# EAGLE board avoccado-panel-felina-faye-gin (EAGLE 7.2.0), part 1 of 11
Avoccado PCB AVR
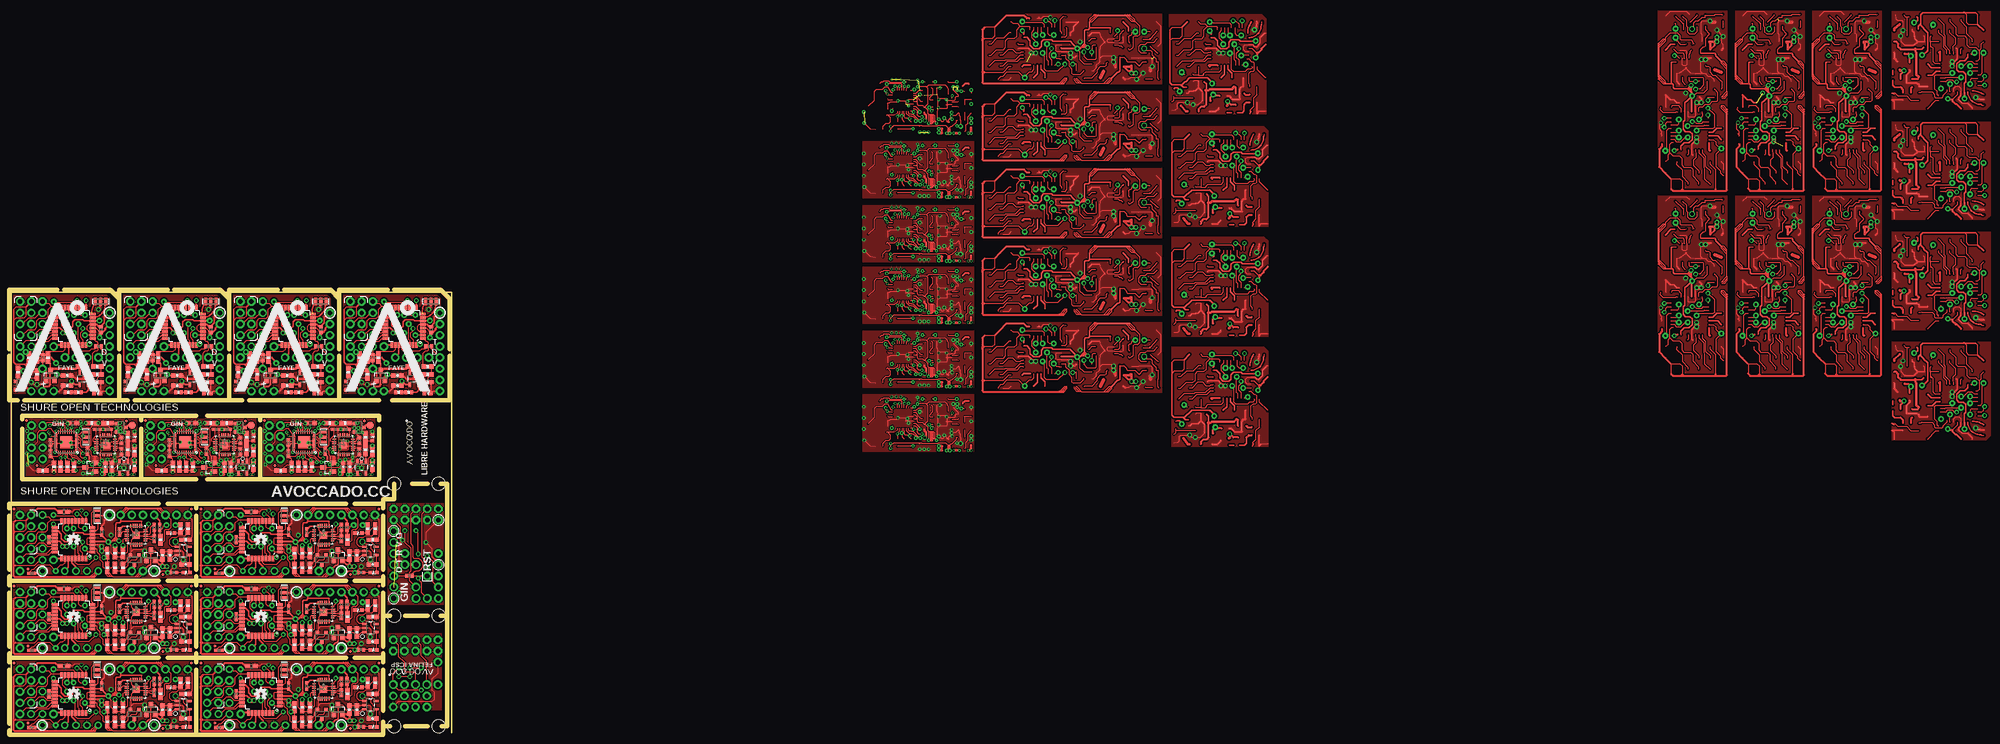
[diagram p0: board, top side]
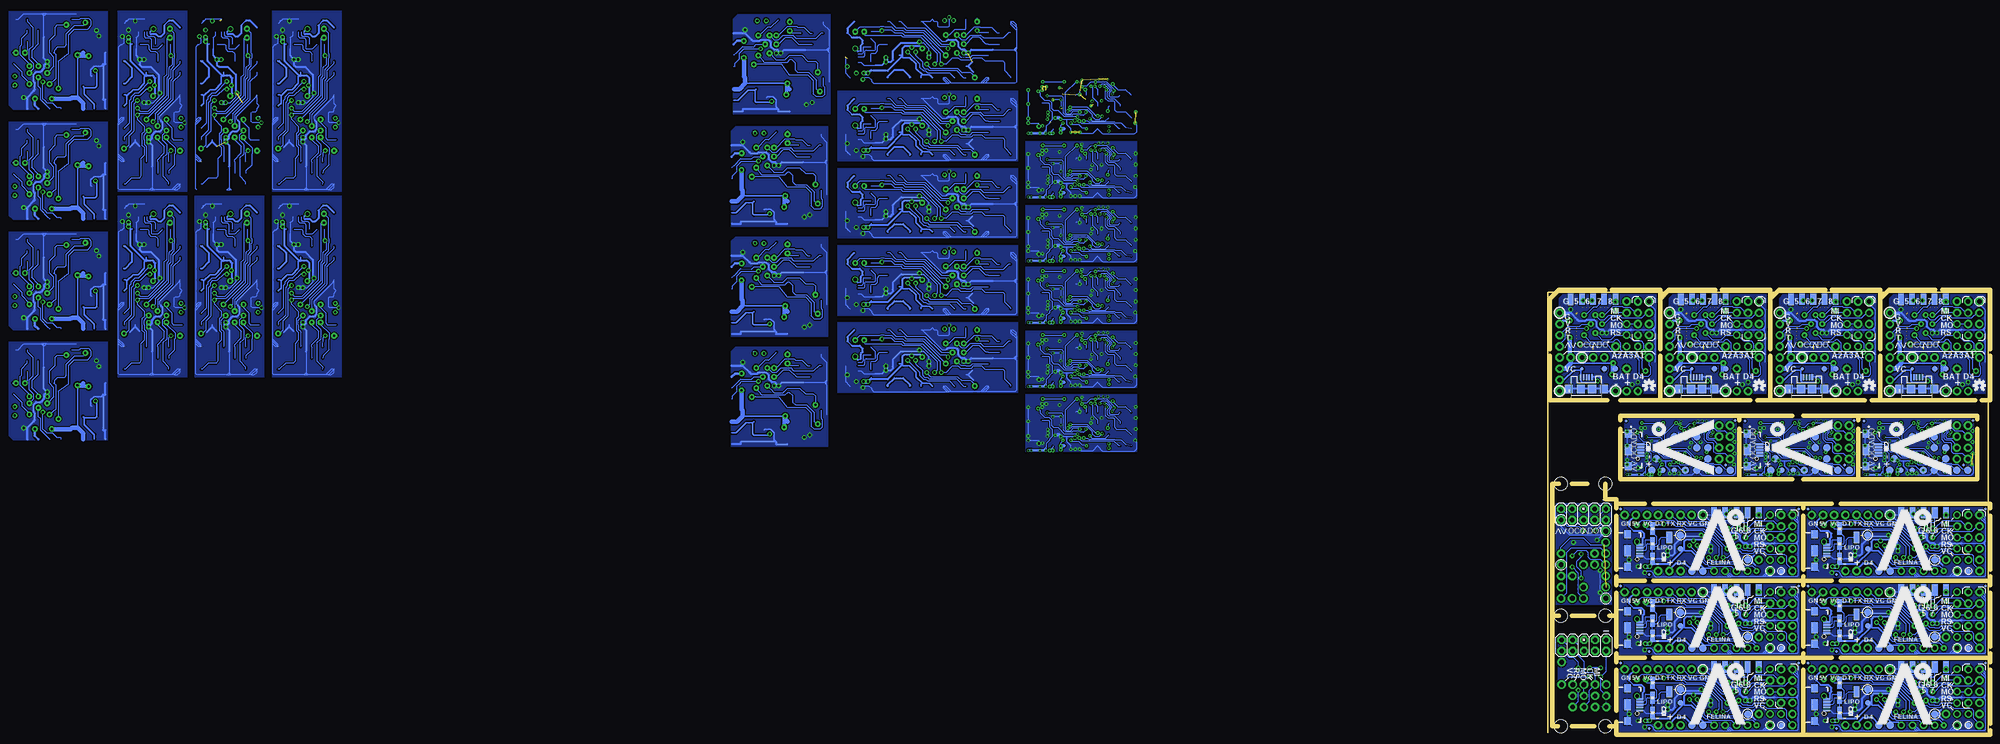
[diagram p1: board, bottom side, seen from below]

Size 100 x 100 mm. Coordinates in mm from the lower left corner, seen from the top.
Outline: 0,0 0,100 100,100 100,0
Copper layers (1*16): Top 0.035mm / dielectric 1.5mm / Bottom 0.035mm
Design rules "SeeedStudio_2layer_DRU_no_angle_20140221 *": minimum track width 6mil, minimum drill 12mil, track to track 6mil, track to pad 6mil, pad to pad 6mil, via to via 6mil, smd to smd 0mil, copper to edge 10mil, drill to drill 10mil, minimum pad ring 10mil, minimum via ring 6mil, stop-mask expansion 0mil, vias tented up to drill 100mil, thermal gap 10mil
Net classes: 1 vcc: width 0.152 mm; 3 usbvcc: width 0.203 mm, drill 0.61 mm, clearance 0.152 mm
Holes 3 mm at 97,1.5 87,1.5 97,26.5 87,26.5 87,26.5 97,26.5 87,56.5 97,56.5
tRestrict: area 10.1,4.7 to 18.2,12.9; area 26.4,7.8 to 30.4,11.9; area 24.3,9.3 to 26.4,11.9; area 52.6,4.7 to 60.7,12.9; area 68.9,7.8 to 72.9,11.9; area 66.8,9.3 to 68.9,11.9; area 10.1,22.2 to 18.2,30.4; area 26.4,25.3 to 30.4,29.4; area 24.3,26.8 to 26.4,29.4; area 52.6,22.2 to 60.7,30.4; area 68.9,25.3 to 72.9,29.4; area 66.8,26.8 to 68.9,29.4; 16 more areas
Milling: 96 lines

## Footprints (pad centres in the part's own frame; a part is rotated, then mirrored left to right if it is on the bottom)
C0402K = smd 0.925 x 0.74: 1 -0.6,0; 2 0.6,0
0603-CAP = smd 1.1 x 1: 1 -0.85,0; 2 0.85,0
C0603 = smd 1.1 x 1: 1 -0.85,0; 2 0.85,0
C0402 = smd 0.7 x 0.9: 1 -0.65,0; 2 0.65,0
LED-0603 = smd 0.8 x 0.8: A 0,-0.75; C 0,0.75
MICRO-FIDUCIAL = smd 0.635 x 0.635: 1 0,0
1X01NS-KIT = drill 1 pad 1.676: 1 0,0
1X02_NO_SILK = drill 1.016 pad 1.88: 1 0,0; 2 2.54,0
1X01 = drill 1.016 pad 1.88: 1 0,0
USB-B-MICRO-SMD_V03 = smd 1.6 x 0.4: D+1 2.8,0; D-1 2.8,0.65; GND1 2.8,-1.3; ID1 2.8,-0.65; VBUS1 2.8,1.3 | smd 1.5 x 1.8: SHIELD1 0,3.7; SHIELD2 0,-3.7 | smd 1.5 x 2.5: SHIELD3 0,0 | hole 0.8: 2.15,-2
USB-MICROB = smd 0.35 x 1.4: D+ 0,2.65; D- -0.65,2.65; GND 1.3,2.65; ID 0.65,2.65; VBUS -1.3,2.65 | smd 1.8 x 1.9: MT1 -4,0; MT2 4,0 | smd 1.9 x 1.9: P$1 -1.27,0; P$2 1.27,0
SOT23 = smd 1 x 1.4: 1 -0.95,-1.1; 2 0.95,-1.1; 3 0,1.1
TQFP32-08 = smd 1.27 x 0.559: 1 -4.293,2.8; 2 -4.293,2; 3 -4.293,1.2; 4 -4.293,0.4; 5 -4.293,-0.4; 6 -4.293,-1.2; 7 -4.293,-2; 8 -4.293,-2.8; 17 4.293,-2.8; 18 4.293,-2; 19 4.293,-1.2; 20 4.293,-0.4; 21 4.293,0.4; 22 4.293,1.2; 23 4.293,2; 24 4.293,2.8 | smd 0.559 x 1.27: 9 -2.8,-4.293; 10 -2,-4.293; 11 -1.2,-4.293; 12 -0.4,-4.293; 13 0.4,-4.293; 14 1.2,-4.293; 15 2,-4.293; 16 2.8,-4.293; 25 2.8,4.293; 26 2,4.293; 27 1.2,4.293; 28 0.4,4.293; 29 -0.4,4.293; 30 -1.2,4.293; 31 -2,4.293; 32 -2.8,4.293
RESONATOR-SMD = smd 0.7 x 1.7: 1 -1.2,0; 2 0,0; 3 1.2,0
SOT23-3 = smd 0.8 x 0.9: 1 -0.95,-1; 2 0.95,-1; 3 0,1.1
0603-RES = smd 1.1 x 1: 1 -0.85,0; 2 0.85,0
R0402 = smd 0.7 x 0.9: 1 -0.65,0; 2 0.65,0
0402-RES = smd 0.7 x 0.9: 1 -0.65,0; 2 0.65,0
PAD.02X.02 = smd 2.54 x 1.27: P$1 0,0
PAD.03X.05 = smd 1.27 x 1.27: P$1 0,0
TP20R = smd 1.7 x 1.7: TP 0,0
PAD.03X.03 = smd 0.762 x 0.762: P$1 0,0
P1-13 = drill 1.1 pad 1.93: TP 0,0
QFN-24-TESTING = smd 1.016 x 0.254: 1 -2.1,1.257; 6 -2.1,-1.25; 13 2.1,-1.25; 18 2.1,1.25 | smd 1.143 x 0.254: 2 -2.163,0.75; 3 -2.163,0.25; 4 -2.163,-0.25; 5 -2.163,-0.75; 14 2.163,-0.75; 15 2.163,-0.25; 16 2.163,0.25; 17 2.163,0.75 | smd 0.254 x 1.016: 7 -1.25,-2.1; 12 1.25,-2.1; 19 1.25,2.1; 24 -1.25,2.1 | smd 0.254 x 1.143: 8 -0.75,-2.163; 9 -0.25,-2.163; 10 0.25,-2.163; 11 0.75,-2.163; 20 0.75,2.163; 21 0.25,2.163; 22 -0.25,2.163; 23 -0.75,2.163 | smd 1.626 x 1.626: P$1 0,0
SOT23-5 = smd 0.55 x 1.2: 1 -0.95,-1.3; 2 0,-1.3; 3 0.95,-1.3; 4 0.95,1.3; 5 -0.95,1.3
MLF32-PAD = smd 0.7 x 0.25: 1 -2.35,1.75; 8 -2.35,-1.75; 17 2.35,-1.75; 24 2.35,1.75 | smd 0.8 x 0.25: 2 -2.35,1.25; 3 -2.35,0.75; 4 -2.35,0.25; 5 -2.35,-0.25; 6 -2.35,-0.75; 7 -2.35,-1.25; 18 2.35,-1.25; 19 2.35,-0.75; 20 2.35,-0.25; 21 2.35,0.25; 22 2.35,0.75; 23 2.35,1.25 | smd 0.25 x 0.7: 9 -1.75,-2.35; 16 1.75,-2.35; 25 1.75,2.35; 32 -1.75,2.35 | smd 0.25 x 0.8: 10 -1.25,-2.35; 11 -0.75,-2.35; 12 -0.25,-2.35; 13 0.25,-2.35; 14 0.75,-2.35; 15 1.25,-2.35; 26 1.25,2.35; 27 0.75,2.35; 28 0.25,2.35; 29 -0.25,2.35; 30 -0.75,2.35; 31 -1.25,2.35 | smd 2.75 x 2.75: PAD 0,0
AVR_ICSP = drill 1.016 pad 1.88 octagon: 1 -1.27,5.08; 2 1.27,5.08; 3 -1.27,2.54; 4 1.27,2.54; 5 -1.27,0; 6 1.27,0; 7 -1.27,-2.54; 8 1.27,-2.54; 9 -1.27,-5.08; 10 1.27,-5.08

## Placement (x,y rotation side)
C1  0.1uF  [C0402K]  8.59,8.8 90 top
C2  0.1uF  [C0402K]  33.73,11.6 90 top
C3  0.1uF  [C0402K]  20.53,10.57 270 top
C4  4.7uF  [0603-CAP]  39.58,3.22 180 top
C5  4.7uF  [0603-CAP]  36.02,5.25 90 top
C6  4.7uF  [0603-CAP]  34.32,5.25 90 top
C7  0.1uF  [C0402K]  4.65,1.18 0 top
C8  0.1uF  [C0402K]  32.47,11.6 270 top
C9  2.2nF  [C0402K]  24.59,10.58 90 top
C10  0.1uF  [C0603]  12.02,15.15 0 top
C11  0.1uF  [C0402K]  32.47,9.06 90 top
C12  0.1uF  [C0603]  54.52,15.15 0 top
C13  0.1uF  [C0402K]  63.03,10.57 270 top
C14  0.1uF  [C0402K]  51.09,8.8 90 top
C15  4.7uF  [0603-CAP]  82.08,3.22 180 top
C16  0.1uF  [C0402K]  76.23,11.6 90 top
C17  4.7uF  [0603-CAP]  78.52,5.25 90 top
C18  4.7uF  [0603-CAP]  76.82,5.25 90 top
C19  0.1uF  [C0402K]  47.15,1.18 0 top
C20  0.1uF  [C0402K]  74.97,11.6 270 top
C21  2.2nF  [C0402K]  67.09,10.58 90 top
C22  0.1uF  [C0402K]  74.97,9.06 90 top
C23  0.1uF  [C0603]  12.02,32.65 0 top
C24  0.1uF  [C0402K]  20.53,28.07 270 top
C25  0.1uF  [C0402K]  8.59,26.3 90 top
C26  4.7uF  [0603-CAP]  39.58,20.72 180 top
C27  0.1uF  [C0402K]  33.73,29.1 90 top
C28  4.7uF  [0603-CAP]  36.02,22.75 90 top
C29  4.7uF  [0603-CAP]  34.32,22.75 90 top
C30  0.1uF  [C0402K]  4.65,18.68 0 top
C31  0.1uF  [C0402K]  32.47,29.1 270 top
C32  2.2nF  [C0402K]  24.59,28.08 90 top
C33  0.1uF  [C0402K]  32.47,26.56 90 top
C34  0.1uF  [C0603]  54.52,32.65 0 top
C35  0.1uF  [C0402K]  63.03,28.07 270 top
C36  0.1uF  [C0402K]  51.09,26.3 90 top
C37  4.7uF  [0603-CAP]  82.08,20.72 180 top
C38  0.1uF  [C0402K]  76.23,29.1 90 top
C39  4.7uF  [0603-CAP]  78.52,22.75 90 top
C40  4.7uF  [0603-CAP]  76.82,22.75 90 top
C41  0.1uF  [C0402K]  47.15,18.68 0 top
C42  0.1uF  [C0402K]  74.97,29.1 270 top
C43  2.2nF  [C0402K]  67.09,28.08 90 top
C44  0.1uF  [C0402K]  74.97,26.56 90 top
C45  0.1uF  [C0603]  12.02,50.15 0 top
C46  0.1uF  [C0402K]  20.53,45.57 270 top
C47  0.1uF  [C0402K]  8.59,43.8 90 top
C48  4.7uF  [0603-CAP]  39.58,38.22 180 top
C49  0.1uF  [C0402K]  33.73,46.6 90 top
C50  4.7uF  [0603-CAP]  36.02,40.25 90 top
C51  4.7uF  [0603-CAP]  34.32,40.25 90 top
C52  0.1uF  [C0402K]  4.65,36.18 0 top
C53  0.1uF  [C0402K]  32.47,46.6 270 top
C54  2.2nF  [C0402K]  24.59,45.58 90 top
C55  0.1uF  [C0402K]  32.47,44.06 90 top
C56  0.1uF  [C0603]  54.52,50.15 0 top
C57  0.1uF  [C0402K]  63.03,45.57 270 top
C58  0.1uF  [C0402K]  51.09,43.8 90 top
C59  4.7uF  [0603-CAP]  82.08,38.22 180 top
C60  0.1uF  [C0402K]  76.23,46.6 90 top
C61  4.7uF  [0603-CAP]  78.52,40.25 90 top
C62  4.7uF  [0603-CAP]  76.82,40.25 90 top
C63  0.1uF  [C0402K]  47.15,36.18 0 top
C64  0.1uF  [C0402K]  74.97,46.6 270 top
C65  2.2nF  [C0402K]  67.09,45.58 90 top
C66  0.1uF  [C0402K]  74.97,44.06 90 top
C67  4.7uF  [C0603]  14.01,70.27 0 top
C68  0.1uF  [C0402K]  17.31,63.93 90 top
C69  0.1uF  [C0402K]  8.93,65.82 90 top
C70  4.7uF  [0603-CAP]  27.98,60.62 90 top
C71  4.7uF  [0603-CAP]  22.9,60.36 90 top
C72  4.7uF  [0603-CAP]  21.37,60.36 90 top
C73  0.1uF  [C0402K]  8.93,63.41 90 top
C74  0.1uF  [C0402K]  25.05,66.33 90 top
C75  2.2nF  [C0402K]  19.59,68.87 0 top
C76  0.1uF  [C0402K]  25.06,63.82 270 top
C77  0.1uF  [C0402K]  22.01,68.87 0 top
C78  4.7uF  [C0603]  41.01,70.27 0 top
C79  0.1uF  [C0402K]  44.31,63.93 90 top
C80  0.1uF  [C0402K]  35.93,65.82 90 top
C81  4.7uF  [0603-CAP]  54.98,60.62 90 top
C82  4.7uF  [0603-CAP]  49.9,60.36 90 top
C83  4.7uF  [0603-CAP]  48.37,60.36 90 top
C84  0.1uF  [C0402K]  35.93,63.41 90 top
C85  0.1uF  [C0402K]  52.05,66.33 90 top
C86  2.2nF  [C0402K]  46.59,68.87 0 top
C87  0.1uF  [C0402K]  52.06,63.82 270 top
C88  0.1uF  [C0402K]  49.01,68.87 0 top
C89  0.1uF  [C0402]  79.32,82.35 270 top
C90  0.1uF  [C0402]  95.32,91.49 270 top
C91  0.1uF  [C0402]  83.64,92.26 90 top
C92  4.7uF  [0603-CAP]  87.7,78.79 180 top
C93  0.1uF  [C0402]  94.81,87.69 0 top
C94  4.7uF  [0603-CAP]  91,83.11 0 top
C95  4.7uF  [0603-CAP]  87.7,81.08 0 top
C96  0.1uF  [C0402]  82.11,85.14 270 top
C97  4.7uF  [C0603]  68.01,70.27 0 top
C98  0.1uF  [C0402K]  71.31,63.93 90 top
C99  0.1uF  [C0402K]  62.93,65.82 90 top
C100  0.1uF  [C0402]  4.32,82.35 270 top
C101  0.1uF  [C0402]  20.32,91.49 270 top
C102  0.1uF  [C0402]  8.64,92.26 90 top
C103  4.7uF  [0603-CAP]  12.7,78.79 180 top
C104  0.1uF  [C0402]  19.81,87.69 0 top
C105  4.7uF  [0603-CAP]  16,83.11 0 top
C106  4.7uF  [0603-CAP]  12.7,81.08 0 top
C107  0.1uF  [C0402]  7.11,85.14 270 top
C108  0.1uF  [C0402]  29.32,82.35 270 top
C109  0.1uF  [C0402]  45.32,91.49 270 top
C110  0.1uF  [C0402]  33.64,92.26 90 top
C111  4.7uF  [0603-CAP]  37.7,78.79 180 top
C112  0.1uF  [C0402]  44.81,87.69 0 top
C113  4.7uF  [0603-CAP]  41,83.11 0 top
C114  4.7uF  [0603-CAP]  37.7,81.08 0 top
C115  0.1uF  [C0402]  32.11,85.14 270 top
C116  0.1uF  [C0402]  54.32,82.35 270 top
C117  0.1uF  [C0402]  70.32,91.49 270 top
C118  0.1uF  [C0402]  58.64,92.26 90 top
C119  4.7uF  [0603-CAP]  62.7,78.79 180 top
C120  0.1uF  [C0402]  69.81,87.69 0 top
C121  4.7uF  [0603-CAP]  66,83.11 0 top
C122  4.7uF  [0603-CAP]  62.7,81.08 0 top
C123  0.1uF  [C0402]  57.11,85.14 270 top
C124  4.7uF  [0603-CAP]  81.98,60.62 90 top
C125  4.7uF  [0603-CAP]  76.9,60.36 90 top
C126  4.7uF  [0603-CAP]  75.37,60.36 90 top
C127  0.1uF  [C0402K]  62.93,63.41 90 top
C128  0.1uF  [C0402K]  79.06,66.33 90 top
C129  2.2nF  [C0402K]  73.59,68.87 0 top
C130  0.1uF  [C0402K]  79.06,63.82 270 top
C131  0.1uF  [C0402K]  76.01,68.87 0 top
C132  [C0402]  90.4,35.58 180 top
D1  LED  [LED-0603]  36.34,10.31 90 top
D2  LED  [LED-0603]  39.83,1.31 90 top
D3  LED  [LED-0603]  78.84,10.31 90 top
D4  LED  [LED-0603]  82.33,1.31 90 top
D5  LED  [LED-0603]  36.34,27.81 90 top
D6  LED  [LED-0603]  39.83,18.81 90 top
D7  LED  [LED-0603]  78.84,27.81 90 top
D8  LED  [LED-0603]  82.33,18.81 90 top
D9  LED  [LED-0603]  36.34,45.31 90 top
D10  LED  [LED-0603]  39.83,36.31 90 top
D11  LED  [LED-0603]  78.84,45.31 90 top
D12  LED  [LED-0603]  82.33,36.31 90 top
D13  LED  [LED-0603]  28.03,67.05 0 top
D14  LED  [LED-0603]  55.03,67.05 0 top
D15  LED  [LED-0603]  94.56,77.02 270 top
D16  LED  [LED-0603]  19.56,77.02 270 top
D17  LED  [LED-0603]  44.56,77.02 270 top
D18  LED  [LED-0603]  69.56,77.02 270 top
D19  LED  [LED-0603]  82.03,67.05 0 top
FID1  FIDUCIALUFIDUCIAL  [MICRO-FIDUCIAL]  0.59,15.79 0 top
FID2  FIDUCIALUFIDUCIAL  [MICRO-FIDUCIAL]  40.97,15.79 0 top
FID3  FIDUCIALUFIDUCIAL  [MICRO-FIDUCIAL]  3.76,2.2 0 top
FID4  FIDUCIALUFIDUCIAL  [MICRO-FIDUCIAL]  83.47,15.79 0 top
FID5  FIDUCIALUFIDUCIAL  [MICRO-FIDUCIAL]  34.5,0.93 0 top
FID6  FIDUCIALUFIDUCIAL  [MICRO-FIDUCIAL]  43.09,15.79 0 top
FID7  FIDUCIALUFIDUCIAL  [MICRO-FIDUCIAL]  0.59,15.79 0 bottom
FID8  FIDUCIALUFIDUCIAL  [MICRO-FIDUCIAL]  40.97,15.79 0 bottom
FID9  FIDUCIALUFIDUCIAL  [MICRO-FIDUCIAL]  34.5,0.93 0 bottom
FID10  FIDUCIALUFIDUCIAL  [MICRO-FIDUCIAL]  46.26,2.2 0 top
FID11  FIDUCIALUFIDUCIAL  [MICRO-FIDUCIAL]  77,0.93 0 top
FID12  FIDUCIALUFIDUCIAL  [MICRO-FIDUCIAL]  43.09,15.79 0 bottom
FID13  FIDUCIALUFIDUCIAL  [MICRO-FIDUCIAL]  83.47,15.79 0 bottom
FID14  FIDUCIALUFIDUCIAL  [MICRO-FIDUCIAL]  77,0.93 0 bottom
FID15  FIDUCIALUFIDUCIAL  [MICRO-FIDUCIAL]  40.97,33.29 0 top
FID16  FIDUCIALUFIDUCIAL  [MICRO-FIDUCIAL]  0.59,33.29 0 top
FID17  FIDUCIALUFIDUCIAL  [MICRO-FIDUCIAL]  3.76,19.7 0 top
FID18  FIDUCIALUFIDUCIAL  [MICRO-FIDUCIAL]  34.5,18.43 0 top
FID19  FIDUCIALUFIDUCIAL  [MICRO-FIDUCIAL]  0.59,33.29 0 bottom
FID20  FIDUCIALUFIDUCIAL  [MICRO-FIDUCIAL]  40.97,33.29 0 bottom
FID21  FIDUCIALUFIDUCIAL  [MICRO-FIDUCIAL]  34.5,18.43 0 bottom
FID22  FIDUCIALUFIDUCIAL  [MICRO-FIDUCIAL]  83.47,33.29 0 top
FID23  FIDUCIALUFIDUCIAL  [MICRO-FIDUCIAL]  43.09,33.29 0 top
FID24  FIDUCIALUFIDUCIAL  [MICRO-FIDUCIAL]  46.26,19.7 0 top
FID25  FIDUCIALUFIDUCIAL  [MICRO-FIDUCIAL]  77,18.43 0 top
FID26  FIDUCIALUFIDUCIAL  [MICRO-FIDUCIAL]  43.09,33.29 0 bottom
FID27  FIDUCIALUFIDUCIAL  [MICRO-FIDUCIAL]  83.47,33.29 0 bottom
FID28  FIDUCIALUFIDUCIAL  [MICRO-FIDUCIAL]  77,18.43 0 bottom
FID29  FIDUCIALUFIDUCIAL  [MICRO-FIDUCIAL]  40.97,50.79 0 top
FID30  FIDUCIALUFIDUCIAL  [MICRO-FIDUCIAL]  0.59,50.79 0 top
FID31  FIDUCIALUFIDUCIAL  [MICRO-FIDUCIAL]  3.76,37.2 0 top
FID32  FIDUCIALUFIDUCIAL  [MICRO-FIDUCIAL]  34.5,35.93 0 top
FID33  FIDUCIALUFIDUCIAL  [MICRO-FIDUCIAL]  0.59,50.79 0 bottom
FID34  FIDUCIALUFIDUCIAL  [MICRO-FIDUCIAL]  40.97,50.79 0 bottom
FID35  FIDUCIALUFIDUCIAL  [MICRO-FIDUCIAL]  34.5,35.93 0 bottom
FID36  FIDUCIALUFIDUCIAL  [MICRO-FIDUCIAL]  83.47,50.79 0 top
FID37  FIDUCIALUFIDUCIAL  [MICRO-FIDUCIAL]  43.09,50.79 0 top
FID38  FIDUCIALUFIDUCIAL  [MICRO-FIDUCIAL]  46.26,37.2 0 top
FID39  FIDUCIALUFIDUCIAL  [MICRO-FIDUCIAL]  77,35.93 0 top
FID40  FIDUCIALUFIDUCIAL  [MICRO-FIDUCIAL]  43.09,50.79 0 bottom
FID41  FIDUCIALUFIDUCIAL  [MICRO-FIDUCIAL]  83.47,50.79 0 bottom
FID42  FIDUCIALUFIDUCIAL  [MICRO-FIDUCIAL]  77,35.93 0 bottom
FID43  FIDUCIALUFIDUCIAL  [MICRO-FIDUCIAL]  3.46,70.9 0 top
FID44  FIDUCIALUFIDUCIAL  [MICRO-FIDUCIAL]  5.88,60.62 0 top
FID45  FIDUCIALUFIDUCIAL  [MICRO-FIDUCIAL]  26.2,70.78 0 top
FID46  FIDUCIALUFIDUCIAL  [MICRO-FIDUCIAL]  5.62,60.74 0 bottom
FID47  FIDUCIALUFIDUCIAL  [MICRO-FIDUCIAL]  3.46,70.9 0 bottom
FID48  FIDUCIALUFIDUCIAL  [MICRO-FIDUCIAL]  28.23,70.78 0 bottom
FID49  FIDUCIALUFIDUCIAL  [MICRO-FIDUCIAL]  30.46,70.9 0 top
FID50  FIDUCIALUFIDUCIAL  [MICRO-FIDUCIAL]  32.88,60.62 0 top
FID51  FIDUCIALUFIDUCIAL  [MICRO-FIDUCIAL]  53.2,70.78 0 top
FID52  FIDUCIALUFIDUCIAL  [MICRO-FIDUCIAL]  32.62,60.74 0 bottom
FID53  FIDUCIALUFIDUCIAL  [MICRO-FIDUCIAL]  30.46,70.9 0 bottom
FID54  FIDUCIALUFIDUCIAL  [MICRO-FIDUCIAL]  55.23,70.78 0 bottom
FID55  FIDUCIALUFIDUCIAL  [MICRO-FIDUCIAL]  57.47,70.9 0 top
FID56  FIDUCIALUFIDUCIAL  [MICRO-FIDUCIAL]  59.88,60.62 0 top
FID57  FIDUCIALUFIDUCIAL  [MICRO-FIDUCIAL]  80.2,70.78 0 top
FID58  FIDUCIALUFIDUCIAL  [MICRO-FIDUCIAL]  59.62,60.74 0 bottom
FID59  FIDUCIALUFIDUCIAL  [MICRO-FIDUCIAL]  57.47,70.9 0 bottom
FID60  FIDUCIALUFIDUCIAL  [MICRO-FIDUCIAL]  82.23,70.78 0 bottom
JP1  M01NOSILK-KIT  [1X01NS-KIT]  19.77,1.69 0 top
JP2  M021X02_NO_SILK  [1X02_NO_SILK]  1.99,14.39 0 top
JP3  M01PTH  [1X01]  22.3,14.39 90 top
JP4  M01NOSILK-KIT  [1X01NS-KIT]  7.07,4.23 0 top
JP5  M01NOSILK-KIT  [1X01NS-KIT]  7.07,1.69 0 top
JP6  M01PTH  [1X01]  40.09,14.39 0 top
JP7  M01PTH  [1X01]  82.58,14.39 0 top
JP8  M01PTH  [1X01]  27.39,14.39 90 top
JP9  M01PTH  [1X01]  29.93,14.39 90 top
JP10  M01PTH  [1X01]  32.47,14.39 90 top
JP11  M01PTH  [1X01]  24.84,14.39 90 top
JP12  M01NOSILK-KIT  [1X01NS-KIT]  7.07,14.39 0 top
JP13  M01PTH  [1X01]  7.07,11.85 0 top
JP14  M01NOSILK-KIT  [1X01NS-KIT]  7.07,9.31 0 top
JP15  M01NOSILK-KIT  [1X01NS-KIT]  7.07,6.77 0 top
JP16  M01NOSILK-KIT  [1X01NS-KIT]  17.23,1.69 0 top
JP17  M01PTH  [1X01]  37.55,14.39 90 top
JP18  M01PTH  [1X01]  35.01,14.39 90 top
JP19  M01PTH  [1X01]  1.99,4.23 90 top
JP20  M01NOSILK-KIT  [1X01NS-KIT]  4.53,4.23 90 top
JP21  M01PTH  [1X01]  9.61,4.23 90 top
JP22  USB_MICROB_PLUGCONN-11752  [USB-B-MICRO-SMD_V03]  39.43,6.35 0 bottom
JP23  M01PTH  [1X01]  27.39,1.69 0 top
JP24  M01PTH  [1X01]  29.93,1.69 0 top
JP25  M01PTH  [1X01]  32.47,1.69 0 top
JP26  M01PTH  [1X01]  69.89,14.39 90 top
JP27  M021X02_NO_SILK  [1X02_NO_SILK]  1.99,11.85 0 top
JP28  M021X02_NO_SILK  [1X02_NO_SILK]  1.99,9.31 0 top
JP29  M021X02_NO_SILK  [1X02_NO_SILK]  1.99,6.77 0 top
JP30  M01NOSILK-KIT  [1X01NS-KIT]  14.69,1.69 0 top
JP31  M01NOSILK-KIT  [1X01NS-KIT]  12.14,1.69 0 top
JP32  M01PTH  [1X01]  72.42,14.39 90 top
JP33  M01PTH  [1X01]  74.97,14.39 90 top
JP34  M01PTH  [1X01]  67.34,14.39 90 top
JP35  M01NOSILK-KIT  [1X01NS-KIT]  49.56,14.39 0 top
JP36  M01PTH  [1X01]  49.56,11.85 0 top
JP37  M01NOSILK-KIT  [1X01NS-KIT]  49.56,9.31 0 top
JP38  M01NOSILK-KIT  [1X01NS-KIT]  49.56,6.77 0 top
JP39  M01PTH  [1X01]  64.81,14.39 90 top
JP40  M01PTH  [1X01]  80.05,14.39 90 top
JP41  M01PTH  [1X01]  77.5,14.39 90 top
JP42  M01PTH  [1X01]  44.48,4.23 90 top
JP43  M01NOSILK-KIT  [1X01NS-KIT]  47.02,4.23 90 top
JP44  M01PTH  [1X01]  52.1,4.23 90 top
JP45  M01PTH  [1X01]  72.42,1.69 0 top
JP46  M01PTH  [1X01]  69.89,1.69 0 top
JP47  M01PTH  [1X01]  74.97,1.69 0 top
JP48  M021X02_NO_SILK  [1X02_NO_SILK]  44.48,14.39 0 top
JP49  M021X02_NO_SILK  [1X02_NO_SILK]  44.48,11.85 0 top
JP50  M021X02_NO_SILK  [1X02_NO_SILK]  44.48,9.31 0 top
JP51  M021X02_NO_SILK  [1X02_NO_SILK]  44.48,6.77 0 top
JP52  M01NOSILK-KIT  [1X01NS-KIT]  62.27,1.69 0 top
JP53  M01NOSILK-KIT  [1X01NS-KIT]  59.73,1.69 0 top
JP54  M01NOSILK-KIT  [1X01NS-KIT]  57.19,1.69 0 top
JP55  M01NOSILK-KIT  [1X01NS-KIT]  54.65,1.69 0 top
JP56  M01NOSILK-KIT  [1X01NS-KIT]  49.56,4.23 0 top
JP57  M01NOSILK-KIT  [1X01NS-KIT]  49.56,1.69 0 top
JP58  USB_MICROB_PLUGCONN-11752  [USB-B-MICRO-SMD_V03]  81.93,6.35 0 bottom
JP59  M01PTH  [1X01]  40.09,31.89 0 top
JP60  M01PTH  [1X01]  27.39,31.89 90 top
JP61  M01PTH  [1X01]  29.93,31.89 90 top
JP62  M01PTH  [1X01]  32.47,31.89 90 top
JP63  M01PTH  [1X01]  24.84,31.89 90 top
JP64  M01NOSILK-KIT  [1X01NS-KIT]  7.07,31.89 0 top
JP65  M01PTH  [1X01]  7.07,29.35 0 top
JP66  M01NOSILK-KIT  [1X01NS-KIT]  7.07,26.81 0 top
JP67  M01NOSILK-KIT  [1X01NS-KIT]  7.07,24.27 0 top
JP68  M01PTH  [1X01]  22.3,31.89 90 top
JP69  M01PTH  [1X01]  37.55,31.89 90 top
JP70  M01PTH  [1X01]  35.01,31.89 90 top
JP71  M01PTH  [1X01]  1.99,21.73 90 top
JP72  M01NOSILK-KIT  [1X01NS-KIT]  4.53,21.73 90 top
JP73  M01PTH  [1X01]  9.61,21.73 90 top
JP74  M01PTH  [1X01]  29.93,19.19 0 top
JP75  M01PTH  [1X01]  27.39,19.19 0 top
JP76  M01PTH  [1X01]  32.47,19.19 0 top
JP77  M021X02_NO_SILK  [1X02_NO_SILK]  1.99,31.89 0 top
JP78  M021X02_NO_SILK  [1X02_NO_SILK]  1.99,29.35 0 top
JP79  M021X02_NO_SILK  [1X02_NO_SILK]  1.99,26.81 0 top
JP80  M021X02_NO_SILK  [1X02_NO_SILK]  1.99,24.27 0 top
JP81  M01NOSILK-KIT  [1X01NS-KIT]  19.77,19.19 0 top
JP82  M01NOSILK-KIT  [1X01NS-KIT]  17.23,19.19 0 top
JP83  M01NOSILK-KIT  [1X01NS-KIT]  14.69,19.19 0 top
JP84  M01NOSILK-KIT  [1X01NS-KIT]  12.14,19.19 0 top
JP85  M01NOSILK-KIT  [1X01NS-KIT]  7.07,21.73 0 top
JP86  M01NOSILK-KIT  [1X01NS-KIT]  7.07,19.19 0 top
JP87  USB_MICROB_PLUGCONN-11752  [USB-B-MICRO-SMD_V03]  39.43,23.85 0 bottom
JP88  M01PTH  [1X01]  82.58,31.89 0 top
JP89  M01PTH  [1X01]  69.89,31.89 90 top
JP90  M01PTH  [1X01]  72.42,31.89 90 top
JP91  M01PTH  [1X01]  74.97,31.89 90 top
JP92  M01PTH  [1X01]  67.34,31.89 90 top
JP93  M01NOSILK-KIT  [1X01NS-KIT]  49.56,31.89 0 top
JP94  M01PTH  [1X01]  49.56,29.35 0 top
JP95  M01NOSILK-KIT  [1X01NS-KIT]  49.56,26.81 0 top
JP96  M01NOSILK-KIT  [1X01NS-KIT]  49.56,24.27 0 top
JP97  M01PTH  [1X01]  64.81,31.89 90 top
JP98  M01PTH  [1X01]  80.05,31.89 90 top
JP99  M01PTH  [1X01]  77.5,31.89 90 top
JP100  M01PTH  [1X01]  44.48,21.73 90 top
JP101  M01NOSILK-KIT  [1X01NS-KIT]  47.02,21.73 90 top
JP102  M01PTH  [1X01]  52.1,21.73 90 top
JP103  M01PTH  [1X01]  72.42,19.19 0 top
JP104  M01PTH  [1X01]  69.89,19.19 0 top
JP105  M01PTH  [1X01]  74.97,19.19 0 top
JP106  M021X02_NO_SILK  [1X02_NO_SILK]  44.48,31.89 0 top
JP107  M021X02_NO_SILK  [1X02_NO_SILK]  44.48,29.35 0 top
JP108  M021X02_NO_SILK  [1X02_NO_SILK]  44.48,26.81 0 top
JP109  M021X02_NO_SILK  [1X02_NO_SILK]  44.48,24.27 0 top
JP110  M01NOSILK-KIT  [1X01NS-KIT]  62.27,19.19 0 top
JP111  M01NOSILK-KIT  [1X01NS-KIT]  59.73,19.19 0 top
JP112  M01NOSILK-KIT  [1X01NS-KIT]  57.19,19.19 0 top
JP113  M01NOSILK-KIT  [1X01NS-KIT]  54.65,19.19 0 top
JP114  M01NOSILK-KIT  [1X01NS-KIT]  49.56,21.73 0 top
JP115  M01NOSILK-KIT  [1X01NS-KIT]  49.56,19.19 0 top
JP116  USB_MICROB_PLUGCONN-11752  [USB-B-MICRO-SMD_V03]  81.93,23.85 0 bottom
JP117  M01PTH  [1X01]  40.09,49.39 0 top
JP118  M01PTH  [1X01]  27.39,49.39 90 top
JP119  M01PTH  [1X01]  29.93,49.39 90 top
JP120  M01PTH  [1X01]  32.47,49.39 90 top
JP121  M01PTH  [1X01]  24.84,49.39 90 top
JP122  M01NOSILK-KIT  [1X01NS-KIT]  7.07,49.39 0 top
JP123  M01PTH  [1X01]  7.07,46.85 0 top
JP124  M01NOSILK-KIT  [1X01NS-KIT]  7.07,44.31 0 top
JP125  M01NOSILK-KIT  [1X01NS-KIT]  7.07,41.77 0 top
JP126  M01PTH  [1X01]  22.3,49.39 90 top
JP127  M01PTH  [1X01]  37.55,49.39 90 top
JP128  M01PTH  [1X01]  35.01,49.39 90 top
JP129  M01PTH  [1X01]  1.99,39.23 90 top
JP130  M01NOSILK-KIT  [1X01NS-KIT]  4.53,39.23 90 top
JP131  M01PTH  [1X01]  9.61,39.23 90 top
JP132  M01PTH  [1X01]  29.93,36.69 0 top
JP133  M01PTH  [1X01]  27.39,36.69 0 top
JP134  M01PTH  [1X01]  32.47,36.69 0 top
JP135  M021X02_NO_SILK  [1X02_NO_SILK]  1.99,49.39 0 top
JP136  M021X02_NO_SILK  [1X02_NO_SILK]  1.99,46.85 0 top
JP137  M021X02_NO_SILK  [1X02_NO_SILK]  1.99,44.31 0 top
JP138  M021X02_NO_SILK  [1X02_NO_SILK]  1.99,41.77 0 top
JP139  M01NOSILK-KIT  [1X01NS-KIT]  19.77,36.69 0 top
JP140  M01NOSILK-KIT  [1X01NS-KIT]  17.23,36.69 0 top
JP141  M01NOSILK-KIT  [1X01NS-KIT]  14.69,36.69 0 top
JP142  M01NOSILK-KIT  [1X01NS-KIT]  12.14,36.69 0 top
JP143  M01NOSILK-KIT  [1X01NS-KIT]  7.07,39.23 0 top
JP144  M01NOSILK-KIT  [1X01NS-KIT]  7.07,36.69 0 top
JP145  USB_MICROB_PLUGCONN-11752  [USB-B-MICRO-SMD_V03]  39.43,41.35 0 bottom
JP146  M01PTH  [1X01]  82.58,49.39 0 top
JP147  M01PTH  [1X01]  69.89,49.39 90 top
JP148  M01PTH  [1X01]  72.42,49.39 90 top
JP149  M01PTH  [1X01]  74.97,49.39 90 top
JP150  M01PTH  [1X01]  67.34,49.39 90 top
JP151  M01NOSILK-KIT  [1X01NS-KIT]  49.56,49.39 0 top
JP152  M01PTH  [1X01]  49.56,46.85 0 top
JP153  M01NOSILK-KIT  [1X01NS-KIT]  49.56,44.31 0 top
JP154  M01NOSILK-KIT  [1X01NS-KIT]  49.56,41.77 0 top
JP155  M01PTH  [1X01]  64.81,49.39 90 top
JP156  M01PTH  [1X01]  80.05,49.39 90 top
JP157  M01PTH  [1X01]  77.5,49.39 90 top
JP158  M01PTH  [1X01]  44.48,39.23 90 top
JP159  M01NOSILK-KIT  [1X01NS-KIT]  47.02,39.23 90 top
JP160  M01PTH  [1X01]  52.1,39.23 90 top
JP161  M01PTH  [1X01]  72.42,36.69 0 top
JP162  M01PTH  [1X01]  69.89,36.69 0 top
JP163  M01PTH  [1X01]  74.97,36.69 0 top
JP164  M021X02_NO_SILK  [1X02_NO_SILK]  44.48,49.39 0 top
JP165  M021X02_NO_SILK  [1X02_NO_SILK]  44.48,46.85 0 top
JP166  M021X02_NO_SILK  [1X02_NO_SILK]  44.48,44.31 0 top
JP167  M021X02_NO_SILK  [1X02_NO_SILK]  44.48,41.77 0 top
JP168  M01NOSILK-KIT  [1X01NS-KIT]  62.27,36.69 0 top
JP169  M01NOSILK-KIT  [1X01NS-KIT]  59.73,36.69 0 top
JP170  M01NOSILK-KIT  [1X01NS-KIT]  57.19,36.69 0 top
JP171  M01NOSILK-KIT  [1X01NS-KIT]  54.65,36.69 0 top
JP172  M01NOSILK-KIT  [1X01NS-KIT]  49.56,39.23 0 top
JP173  M01NOSILK-KIT  [1X01NS-KIT]  49.56,36.69 0 top
JP174  USB_MICROB_PLUGCONN-11752  [USB-B-MICRO-SMD_V03]  81.93,41.35 0 bottom
JP175  M021X02_NO_SILK  [1X02_NO_SILK]  4.61,69.76 0 top
JP176  M021X02_NO_SILK  [1X02_NO_SILK]  4.61,67.22 0 top
JP177  M021X02_NO_SILK  [1X02_NO_SILK]  4.61,64.68 0 top
JP178  M021X02_NO_SILK  [1X02_NO_SILK]  4.61,62.14 0 top
JP179  USB_MICROB_PLUGCONN-11752  [USB-B-MICRO-SMD_V03]  27.72,64.17 0 bottom
JP180  M021X02_NO_SILK  [1X02_NO_SILK]  31.61,69.76 0 top
JP181  M021X02_NO_SILK  [1X02_NO_SILK]  31.61,67.22 0 top
JP182  M021X02_NO_SILK  [1X02_NO_SILK]  31.61,64.68 0 top
JP183  M021X02_NO_SILK  [1X02_NO_SILK]  31.61,62.14 0 top
JP184  USB_MICROB_PLUGCONN-11752  [USB-B-MICRO-SMD_V03]  54.72,64.17 0 bottom
JP185  M01PTH  [1X01]  82.11,82.61 0 top
JP186  M01PTH  [1X01]  97.35,90.23 0 top
JP187  M01PTH  [1X01]  97.35,87.69 0 top
JP188  M01PTH  [1X01]  97.35,85.15 0 top
JP189  M01PTH  [1X01]  97.35,92.77 0 top
JP190  M01PTH  [1X01]  7.11,82.61 0 top
JP191  M01PTH  [1X01]  22.35,90.23 0 top
JP192  M01PTH  [1X01]  22.35,87.69 0 top
JP193  M01PTH  [1X01]  22.35,85.15 0 top
JP194  M01PTH  [1X01]  22.35,92.77 0 top
JP195  M01PTH  [1X01]  7.11,97.85 0 top
JP196  M01PTH  [1X01]  7.11,95.31 0 top
JP197  M01NOSILK-KIT  [1X01NS-KIT]  7.11,92.77 0 top
JP198  M01NOSILK-KIT  [1X01NS-KIT]  7.11,90.23 0 top
JP199  M01PTH  [1X01]  22.35,95.31 0 top
JP200  M01PTH  [1X01]  22.35,80.06 0 top
JP201  M01PTH  [1X01]  22.35,82.61 0 top
JP202  M01PTH  [1X01]  2.03,87.69 90 top
JP203  M01NOSILK-KIT  [1X01NS-KIT]  4.57,87.69 90 top
JP204  M01PTH  [1X01]  9.65,87.69 90 top
JP205  M01NOSILK-KIT  [1X01NS-KIT]  7.11,87.69 90 top
JP206  M01PTH  [1X01]  7.11,77.52 0 top
JP207  M01PTH  [1X01]  4.57,77.52 0 top
JP208  M01PTH  [1X01]  9.65,77.52 0 top
JP209  M01PTH  [1X01]  22.35,77.53 0 top
JP210  M021X02_NO_SILK  [1X02_NO_SILK]  2.03,97.85 0 top
JP211  M021X02_NO_SILK  [1X02_NO_SILK]  2.03,95.31 0 top
JP212  M021X02_NO_SILK  [1X02_NO_SILK]  2.03,92.77 0 top
JP213  M021X02_NO_SILK  [1X02_NO_SILK]  2.03,90.23 0 top
JP214  M021X02_NO_SILK  [1X02_NO_SILK]  19.81,85.14 180 top
JP215  M021X02_NO_SILK  [1X02_NO_SILK]  14.73,85.14 180 top
JP216  USB-MICROB  [USB-MICROB]  16.26,78.03 0 bottom
JP217  M01PTH  [1X01]  32.11,82.61 0 top
JP218  M01PTH  [1X01]  47.35,90.23 0 top
JP219  M01PTH  [1X01]  47.35,87.69 0 top
JP220  M01PTH  [1X01]  47.35,85.15 0 top
JP221  M01PTH  [1X01]  47.35,92.77 0 top
JP222  M01PTH  [1X01]  32.11,97.85 0 top
JP223  M01PTH  [1X01]  32.11,95.31 0 top
JP224  M01NOSILK-KIT  [1X01NS-KIT]  32.11,92.77 0 top
JP225  M01NOSILK-KIT  [1X01NS-KIT]  32.11,90.23 0 top
JP226  M01PTH  [1X01]  47.35,95.31 0 top
JP227  M01PTH  [1X01]  47.35,80.06 0 top
JP228  M01PTH  [1X01]  47.35,82.61 0 top
JP229  M01PTH  [1X01]  27.03,87.69 90 top
JP230  M01NOSILK-KIT  [1X01NS-KIT]  29.57,87.69 90 top
JP231  M01PTH  [1X01]  34.65,87.69 90 top
JP232  M01NOSILK-KIT  [1X01NS-KIT]  32.11,87.69 90 top
JP233  M01PTH  [1X01]  32.11,77.52 0 top
JP234  M01PTH  [1X01]  29.57,77.52 0 top
JP235  M01PTH  [1X01]  34.65,77.52 0 top
JP236  M01PTH  [1X01]  47.35,77.53 0 top
JP237  M021X02_NO_SILK  [1X02_NO_SILK]  27.03,97.85 0 top
JP238  M021X02_NO_SILK  [1X02_NO_SILK]  27.03,95.31 0 top
JP239  M021X02_NO_SILK  [1X02_NO_SILK]  27.03,92.77 0 top
JP240  M021X02_NO_SILK  [1X02_NO_SILK]  27.03,90.23 0 top
JP241  M021X02_NO_SILK  [1X02_NO_SILK]  44.81,85.14 180 top
JP242  M021X02_NO_SILK  [1X02_NO_SILK]  39.73,85.14 180 top
JP243  USB-MICROB  [USB-MICROB]  41.26,78.03 0 bottom
JP244  M01PTH  [1X01]  57.11,82.61 0 top
JP245  M01PTH  [1X01]  72.35,90.23 0 top
JP246  M01PTH  [1X01]  72.35,87.69 0 top
JP247  M01PTH  [1X01]  72.35,85.15 0 top
JP248  M01PTH  [1X01]  72.35,92.77 0 top
JP249  M01PTH  [1X01]  57.11,97.85 0 top
JP250  M01PTH  [1X01]  57.11,95.31 0 top
JP251  M01NOSILK-KIT  [1X01NS-KIT]  57.11,92.77 0 top
JP252  M01NOSILK-KIT  [1X01NS-KIT]  57.11,90.23 0 top
JP253  M01PTH  [1X01]  72.35,95.31 0 top
JP254  M01PTH  [1X01]  72.35,80.06 0 top
JP255  M01PTH  [1X01]  72.35,82.61 0 top
JP256  M01PTH  [1X01]  52.03,87.69 90 top
JP257  M01NOSILK-KIT  [1X01NS-KIT]  54.57,87.69 90 top
JP258  M01PTH  [1X01]  59.65,87.69 90 top
JP259  M01NOSILK-KIT  [1X01NS-KIT]  57.11,87.69 90 top
JP260  M01PTH  [1X01]  57.11,77.52 0 top
JP261  M01PTH  [1X01]  54.57,77.52 0 top
JP262  M01PTH  [1X01]  59.65,77.52 0 top
JP263  M01PTH  [1X01]  72.35,77.53 0 top
JP264  M021X02_NO_SILK  [1X02_NO_SILK]  52.03,97.85 0 top
JP265  M021X02_NO_SILK  [1X02_NO_SILK]  52.03,95.31 0 top
JP266  M021X02_NO_SILK  [1X02_NO_SILK]  52.03,92.77 0 top
JP267  M021X02_NO_SILK  [1X02_NO_SILK]  52.03,90.23 0 top
JP268  M021X02_NO_SILK  [1X02_NO_SILK]  69.81,85.14 180 top
JP269  M021X02_NO_SILK  [1X02_NO_SILK]  64.73,85.14 180 top
JP270  USB-MICROB  [USB-MICROB]  66.26,78.03 0 bottom
JP271  M01PTH  [1X01]  82.11,97.85 0 top
JP272  M01PTH  [1X01]  82.11,95.31 0 top
JP273  M01NOSILK-KIT  [1X01NS-KIT]  82.11,92.77 0 top
JP274  M01NOSILK-KIT  [1X01NS-KIT]  82.11,90.23 0 top
JP275  M01PTH  [1X01]  97.35,95.31 0 top
JP276  M01PTH  [1X01]  97.35,80.06 0 top
JP277  M01PTH  [1X01]  97.35,82.61 0 top
JP278  M01PTH  [1X01]  77.03,87.69 90 top
JP279  M01NOSILK-KIT  [1X01NS-KIT]  79.57,87.69 90 top
JP280  M01PTH  [1X01]  84.65,87.69 90 top
JP281  M01NOSILK-KIT  [1X01NS-KIT]  82.11,87.69 90 top
JP282  M01PTH  [1X01]  82.11,77.52 0 top
JP283  M01PTH  [1X01]  79.57,77.52 0 top
JP284  M01PTH  [1X01]  84.65,77.52 0 top
JP285  M01PTH  [1X01]  97.35,77.53 0 top
JP286  M021X02_NO_SILK  [1X02_NO_SILK]  77.03,97.85 0 top
JP287  M021X02_NO_SILK  [1X02_NO_SILK]  77.03,95.31 0 top
JP288  M021X02_NO_SILK  [1X02_NO_SILK]  77.03,92.77 0 top
JP289  M021X02_NO_SILK  [1X02_NO_SILK]  77.03,90.23 0 top
JP290  M021X02_NO_SILK  [1X02_NO_SILK]  94.81,85.14 180 top
JP291  M021X02_NO_SILK  [1X02_NO_SILK]  89.73,85.14 180 top
JP292  USB-MICROB  [USB-MICROB]  91.26,78.03 0 bottom
JP293  M021X02_NO_SILK  [1X02_NO_SILK]  58.61,69.76 0 top
JP294  M021X02_NO_SILK  [1X02_NO_SILK]  58.61,67.22 0 top
JP295  M021X02_NO_SILK  [1X02_NO_SILK]  58.61,64.68 0 top
JP296  M021X02_NO_SILK  [1X02_NO_SILK]  58.61,62.14 0 top
JP297  USB_MICROB_PLUGCONN-11752  [USB-B-MICRO-SMD_V03]  81.72,64.17 0 bottom
JP876  M021X02_NO_SILK  [1X02_NO_SILK]  86.74,5.83 90 top
JP877  M021X02_NO_SILK  [1X02_NO_SILK]  89.28,5.83 90 top
JP878  M021X02_NO_SILK  [1X02_NO_SILK]  91.82,5.83 90 top
JP879  M021X02_NO_SILK  [1X02_NO_SILK]  94.36,5.83 90 top
LDO  MCP1703CB  [SOT23]  31.7,5.25 0 top
LDO1  MCP1703CB  [SOT23]  74.2,5.25 0 top
LDO2  MCP1703CB  [SOT23]  31.7,22.75 0 top
LDO3  MCP1703CB  [SOT23]  74.2,22.75 0 top
LDO4  MCP1703CB  [SOT23]  31.7,40.25 0 top
LDO5  MCP1703CB  [SOT23]  74.2,40.25 0 top
LDO6  MCP1703CB  [SOT23]  17.94,60.23 90 top
LDO7  MCP1703CB  [SOT23]  44.94,60.23 90 top
LDO8  MCP1703CB  [SOT23]  83.89,81.08 0 top
LDO9  MCP1703CB  [SOT23]  8.89,81.08 0 top
LDO10  MCP1703CB  [SOT23]  33.89,81.08 0 top
LDO11  MCP1703CB  [SOT23]  58.89,81.08 0 top
LDO12  MCP1703CB  [SOT23]  71.94,60.23 90 top
LOGO1  OSHW-LOGOS  [OSHW-LOGO-S]  14.18,8.8 0 top
LOGO2  OSHW-LOGOS  [OSHW-LOGO-S]  56.68,8.8 0 top
LOGO3  OSHW-LOGOS  [OSHW-LOGO-S]  14.18,26.3 0 top
LOGO4  OSHW-LOGOS  [OSHW-LOGO-S]  56.68,26.3 0 top
LOGO5  OSHW-LOGOS  [OSHW-LOGO-S]  14.18,43.8 0 top
LOGO6  OSHW-LOGOS  [OSHW-LOGO-S]  56.68,43.8 0 top
LOGO7  OSHW-LOGOS  [OSHW-LOGO-S]  2.03,78.77 0 bottom
LOGO8  OSHW-LOGOS  [OSHW-LOGO-S]  27.03,78.77 0 bottom
LOGO9  OSHW-LOGOS  [OSHW-LOGO-S]  52.03,78.77 0 bottom
LOGO10  OSHW-LOGOS  [OSHW-LOGO-S]  77.03,78.77 0 bottom
MCU  ATMEGA328P_TQFP  [TQFP32-08]  14.18,8.8 180 top
MCU1  ATMEGA328P_TQFP  [TQFP32-08]  56.68,8.8 180 top
MCU2  ATMEGA328P_TQFP  [TQFP32-08]  14.18,26.3 180 top
MCU3  ATMEGA328P_TQFP  [TQFP32-08]  56.68,26.3 180 top
MCU4  ATMEGA328P_TQFP  [TQFP32-08]  14.18,43.8 180 top
MCU5  ATMEGA328P_TQFP  [TQFP32-08]  56.68,43.8 180 top
MCU6  ATMEGA328P_TQFP  [TQFP32-08]  14.22,92.26 180 top
MCU7  ATMEGA328P_TQFP  [TQFP32-08]  39.22,92.26 180 top
MCU8  ATMEGA328P_TQFP  [TQFP32-08]  64.22,92.26 180 top
MCU9  ATMEGA328P_TQFP  [TQFP32-08]  89.22,92.26 180 top
Q1  16MHz  [RESONATOR-SMD]  19.51,14.27 270 top
Q2  FET  [SOT23-3]  28.02,4.23 180 top
Q3  16MHz  [RESONATOR-SMD]  62.01,14.27 270 top
Q4  FET  [SOT23-3]  70.52,4.23 180 top
Q5  16MHz  [RESONATOR-SMD]  19.51,31.77 270 top
Q6  FET  [SOT23-3]  28.02,21.73 180 top
Q7  16MHz  [RESONATOR-SMD]  62.01,31.77 270 top
Q8  FET  [SOT23-3]  70.52,21.73 180 top
Q9  16MHz  [RESONATOR-SMD]  19.51,49.27 270 top
Q10  FET  [SOT23-3]  28.02,39.23 180 top
Q11  16MHz  [RESONATOR-SMD]  62.01,49.27 270 top
Q12  FET  [SOT23-3]  70.52,39.23 180 top
Q13  16MHz  [RESONATOR-SMD]  16.93,67.09 270 top
Q14  N-FET  [SOT23-3]  24.93,69.25 270 top
Q15  16MHz  [RESONATOR-SMD]  43.93,67.09 270 top
Q16  N-FET  [SOT23-3]  51.93,69.25 270 top
Q17  16MHz  [RESONATOR-SMD]  95.32,97.9 0 top
Q18  FET  [SOT23-3]  77.03,78.79 270 top
Q19  16MHz  [RESONATOR-SMD]  20.32,97.9 0 top
Q20  FET  [SOT23-3]  2.03,78.79 270 top
Q21  16MHz  [RESONATOR-SMD]  45.32,97.9 0 top
Q22  FET  [SOT23-3]  27.03,78.79 270 top
Q23  16MHz  [RESONATOR-SMD]  70.32,97.9 0 top
Q24  FET  [SOT23-3]  52.03,78.79 270 top
Q25  16MHz  [RESONATOR-SMD]  70.93,67.09 270 top
Q26  N-FET  [SOT23-3]  78.93,69.25 270 top
R1  511R  [0603-RES]  23.57,2.45 270 top
R2  10K  [0603-RES]  33.86,8.8 270 top
R3  2K  [0603-RES]  39.58,8.8 180 top
R4  2K  [0603-RES]  40.15,11.34 270 top
R5  4.7M  [0603-RES]  25.35,2.45 270 top
R6  511R  [0603-RES]  38.43,11.34 270 top
R7  4.7M  [0603-RES]  21.8,5.76 270 top
R8  4.7M  [0603-RES]  21.8,2.45 270 top
R9  2K  [R0402]  36.91,1.36 0 top
R10  10K  [0603-RES]  25.35,5.76 270 top
R11  10K  [0603-RES]  23.57,5.76 270 top
R12  10K  [0603-RES]  76.36,8.8 270 top
R13  68R  [0603-RES]  33.73,11.34 270 bottom
R14  68R  [0603-RES]  33.73,7.92 90 bottom
R15  2K  [0603-RES]  33.73,4.49 270 bottom
R16  511R  [0603-RES]  66.08,2.45 270 top
R17  2K  [0603-RES]  82.08,8.8 180 top
R18  2K  [0603-RES]  82.65,11.34 270 top
R19  4.7M  [0603-RES]  67.85,2.45 270 top
R20  511R  [0603-RES]  80.93,11.34 270 top
R21  4.7M  [0603-RES]  64.3,5.76 270 top
R22  4.7M  [0603-RES]  64.3,2.45 270 top
R23  10K  [0603-RES]  67.85,5.76 270 top
R24  10K  [0603-RES]  66.08,5.76 270 top
R25  68R  [0603-RES]  76.23,11.34 270 bottom
R26  68R  [0603-RES]  76.23,7.92 90 bottom
R27  2K  [0603-RES]  76.23,4.49 270 bottom
R28  2K  [R0402]  79.41,1.36 0 top
R29  10K  [0603-RES]  33.86,26.3 270 top
R30  511R  [0603-RES]  23.57,19.95 270 top
R31  2K  [0603-RES]  39.58,26.3 180 top
R32  2K  [0603-RES]  40.15,28.84 270 top
R33  4.7M  [0603-RES]  25.35,19.95 270 top
R34  511R  [0603-RES]  38.43,28.84 270 top
R35  4.7M  [0603-RES]  21.8,23.26 270 top
R36  4.7M  [0603-RES]  21.8,19.95 270 top
R37  10K  [0603-RES]  25.35,23.26 270 top
R38  10K  [0603-RES]  23.57,23.26 270 top
R39  68R  [0603-RES]  33.73,28.84 270 bottom
R40  68R  [0603-RES]  33.73,25.41 90 bottom
R41  2K  [0603-RES]  33.73,21.99 270 bottom
R42  2K  [R0402]  36.91,18.86 0 top
R43  10K  [0603-RES]  76.36,26.3 270 top
R44  511R  [0603-RES]  66.08,19.95 270 top
R45  2K  [0603-RES]  82.08,26.3 180 top
R46  2K  [0603-RES]  82.65,28.84 270 top
R47  4.7M  [0603-RES]  67.85,19.95 270 top
R48  511R  [0603-RES]  80.93,28.84 270 top
R49  4.7M  [0603-RES]  64.3,23.26 270 top
R50  4.7M  [0603-RES]  64.3,19.95 270 top
R51  10K  [0603-RES]  67.85,23.26 270 top
R52  10K  [0603-RES]  66.08,23.26 270 top
R53  68R  [0603-RES]  76.23,28.84 270 bottom
R54  68R  [0603-RES]  76.23,25.41 90 bottom
R55  2K  [0603-RES]  76.23,21.99 270 bottom
R56  2K  [R0402]  79.41,18.86 0 top
R57  10K  [0603-RES]  33.86,43.8 270 top
R58  511R  [0603-RES]  23.57,37.45 270 top
R59  2K  [0603-RES]  39.58,43.8 180 top
R60  2K  [0603-RES]  40.15,46.34 270 top
R61  4.7M  [0603-RES]  25.35,37.45 270 top
R62  511R  [0603-RES]  38.43,46.34 270 top
R63  4.7M  [0603-RES]  21.8,40.76 270 top
R64  4.7M  [0603-RES]  21.8,37.45 270 top
R65  10K  [0603-RES]  25.35,40.76 270 top
R66  10K  [0603-RES]  23.57,40.76 270 top
R67  68R  [0603-RES]  33.73,46.34 270 bottom
R68  68R  [0603-RES]  33.73,42.91 90 bottom
R69  2K  [0603-RES]  33.73,39.49 270 bottom
R70  2K  [R0402]  36.91,36.36 0 top
R71  10K  [0603-RES]  76.36,43.8 270 top
R72  511R  [0603-RES]  66.08,37.45 270 top
R73  2K  [0603-RES]  82.08,43.8 180 top
R74  2K  [0603-RES]  82.65,46.34 270 top
R75  4.7M  [0603-RES]  67.85,37.45 270 top
R76  511R  [0603-RES]  80.93,46.34 270 top
R77  4.7M  [0603-RES]  64.3,40.76 270 top
R78  4.7M  [0603-RES]  64.3,37.45 270 top
R79  10K  [0603-RES]  67.85,40.76 270 top
R80  10K  [0603-RES]  66.08,40.76 270 top
R81  68R  [0603-RES]  76.23,46.34 270 bottom
R82  68R  [0603-RES]  76.23,42.91 90 bottom
R83  2K  [0603-RES]  76.23,39.49 270 bottom
R84  2K  [R0402]  79.41,36.36 0 top
R85  10K  [0603-RES]  14.26,60.36 270 top
R86  511R  [0603-RES]  18.32,70.27 0 top
R87  2K  [0603-RES]  27.98,63.92 270 top
R88  2K  [0603-RES]  26.45,64.17 270 top
R89  4.7M  [0603-RES]  21.88,70.27 0 top
R90  511R  [0603-RES]  26.45,67.09 270 top
R91  4.7M  [0603-RES]  7.15,59.47 0 top
R92  4.7M  [0603-RES]  9.69,60.36 270 top
R93  10K  [0603-RES]  12.74,60.36 270 top
R94  10K  [0603-RES]  11.21,60.36 270 top
R95  10K  [0603-RES]  41.26,60.36 270 top
R96  511R  [0603-RES]  45.32,70.27 0 top
R97  2K  [0603-RES]  54.98,63.92 270 top
R98  2K  [0603-RES]  53.45,64.17 270 top
R99  4.7M  [0603-RES]  48.88,70.27 0 top
R100  511R  [0603-RES]  53.45,67.09 270 top
R101  4.7M  [0603-RES]  34.15,59.47 0 top
R102  4.7M  [0603-RES]  36.69,60.36 270 top
R103  10K  [0603-RES]  39.74,60.36 270 top
R104  10K  [0603-RES]  38.21,60.36 270 top
R105  10K  [0603-RES]  79.06,85.14 270 top
R106  511R  [0603-RES]  76.52,81.84 270 top
R107  RP  [0603-RES]  94.56,79.56 180 top
R108  1K  [0603-RES]  94.56,81.33 180 top
R109  4.7M  [0603-RES]  80.84,81.33 270 top
R110  511R  [0603-RES]  94.56,83.11 0 top
R111  4.7M  [0603-RES]  80.84,85.14 90 top
R112  4.7M  [0603-RES]  83.38,85.14 270 top
R113  1K  [0402-RES]  90.24,77.27 0 top
R114  1K  [0402-RES]  87.95,77.27 0 top
R115  10K  [0603-RES]  4.06,85.14 270 top
R116  511R  [0603-RES]  1.52,81.84 270 top
R117  RP  [0603-RES]  19.56,79.56 180 top
R118  1K  [0603-RES]  19.56,81.33 180 top
R119  4.7M  [0603-RES]  5.84,81.33 270 top
R120  511R  [0603-RES]  19.56,83.11 0 top
R121  4.7M  [0603-RES]  5.84,85.14 90 top
R122  4.7M  [0603-RES]  8.38,85.14 270 top
R123  1K  [0402-RES]  15.24,77.27 0 top
R124  1K  [0402-RES]  12.95,77.27 0 top
R125  10K  [0603-RES]  29.06,85.14 270 top
R126  511R  [0603-RES]  26.52,81.84 270 top
R127  RP  [0603-RES]  44.56,79.56 180 top
R128  1K  [0603-RES]  44.56,81.33 180 top
R129  4.7M  [0603-RES]  30.84,81.33 270 top
R130  511R  [0603-RES]  44.56,83.11 0 top
R131  4.7M  [0603-RES]  30.84,85.14 90 top
R132  4.7M  [0603-RES]  33.38,85.14 270 top
R133  1K  [0402-RES]  40.24,77.27 0 top
R134  1K  [0402-RES]  37.95,77.27 0 top
R135  10K  [0603-RES]  54.06,85.14 270 top
R136  511R  [0603-RES]  51.52,81.84 270 top
R137  RP  [0603-RES]  69.56,79.56 180 top
R138  1K  [0603-RES]  69.56,81.33 180 top
R139  4.7M  [0603-RES]  55.84,81.33 270 top
R140  511R  [0603-RES]  69.56,83.11 0 top
R141  4.7M  [0603-RES]  55.84,85.14 90 top
R142  4.7M  [0603-RES]  58.38,85.14 270 top
R143  1K  [0402-RES]  65.24,77.27 0 top
R144  1K  [0402-RES]  62.95,77.27 0 top
R145  10K  [0603-RES]  68.26,60.36 270 top
R146  511R  [0603-RES]  72.32,70.27 0 top
R147  2K  [0603-RES]  81.98,63.92 270 top
R148  2K  [0603-RES]  80.45,64.17 270 top
R149  4.7M  [0603-RES]  75.88,70.27 0 top
R150  511R  [0603-RES]  80.45,67.09 270 top
R151  4.7M  [0603-RES]  61.15,59.47 0 top
R152  4.7M  [0603-RES]  63.69,60.36 270 top
R153  10K  [0603-RES]  66.74,60.36 270 top
R154  10K  [0603-RES]  65.21,60.36 270 top
TP1  TEST-POINT2  [PAD.02X.02]  17.23,14.9 270 bottom
TP2  M01PTH  [1X01]  1.99,1.69 0 top
TP3  TEST-POINT3X5  [PAD.03X.05]  4.53,1.69 270 bottom
TP4  TPTP20R  [TP20R]  27.39,9.82 0 bottom
TP5  TEST-POINT3X5  [PAD.03X.05]  27.39,6.77 0 bottom
TP6  TEST-POINT2  [PAD.02X.02]  14.69,14.9 270 bottom
TP7  TEST-POINT2  [PAD.02X.02]  12.14,14.9 270 bottom
TP8  TEST-POINT2  [PAD.02X.02]  9.61,14.9 270 bottom
TP9  TEST-POINT2  [PAD.02X.02]  19.77,14.9 270 bottom
TP10  TPTP20R  [TP20R]  24.84,1.69 0 bottom
TP11  TEST-POINT2  [PAD.02X.02]  29.93,9.31 270 bottom
TP12  TPTP20R  [TP20R]  12.14,4.23 0 bottom
TP13  TPTP20R  [TP20R]  22.3,1.69 0 bottom
TP14  TEST-POINT2  [PAD.02X.02]  59.73,14.9 270 bottom
TP15  TEST-POINT2  [PAD.02X.02]  57.19,14.9 270 bottom
TP16  TEST-POINT2  [PAD.02X.02]  54.65,14.9 270 bottom
TP17  TEST-POINT2  [PAD.02X.02]  52.1,14.9 270 bottom
TP18  M01PTH  [1X01]  44.48,1.69 0 top
TP19  TEST-POINT3X5  [PAD.03X.05]  69.89,6.77 0 bottom
TP20  TEST-POINT3X5  [PAD.03X.05]  47.02,1.69 270 bottom
TP21  TEST-POINT2  [PAD.02X.02]  62.27,14.9 270 bottom
TP22  TPTP20R  [TP20R]  67.34,1.69 0 bottom
TP23  TEST-POINT2  [PAD.02X.02]  72.42,9.31 270 bottom
TP24  TPTP20R  [TP20R]  54.65,4.23 0 bottom
TP25  TPTP20R  [TP20R]  64.81,1.69 0 bottom
TP26  TPTP20R  [TP20R]  69.89,9.82 0 bottom
TP27  TEST-POINT2  [PAD.02X.02]  17.23,32.4 270 bottom
TP28  TEST-POINT2  [PAD.02X.02]  14.69,32.4 270 bottom
TP29  TEST-POINT2  [PAD.02X.02]  12.14,32.4 270 bottom
TP30  TEST-POINT2  [PAD.02X.02]  9.61,32.4 270 bottom
TP31  M01PTH  [1X01]  1.99,19.19 0 top
TP32  TEST-POINT3X5  [PAD.03X.05]  27.39,24.27 0 bottom
TP33  TEST-POINT3X5  [PAD.03X.05]  4.53,19.19 270 bottom
TP34  TEST-POINT2  [PAD.02X.02]  19.77,32.4 270 bottom
TP35  TPTP20R  [TP20R]  24.84,19.19 0 bottom
TP36  TEST-POINT2  [PAD.02X.02]  29.93,26.81 270 bottom
TP37  TPTP20R  [TP20R]  12.14,21.73 0 bottom
TP38  TPTP20R  [TP20R]  22.3,19.19 0 bottom
TP39  TPTP20R  [TP20R]  27.39,27.32 0 bottom
TP40  TEST-POINT2  [PAD.02X.02]  59.73,32.4 270 bottom
TP41  TEST-POINT2  [PAD.02X.02]  57.19,32.4 270 bottom
TP42  TEST-POINT2  [PAD.02X.02]  54.65,32.4 270 bottom
TP43  TEST-POINT2  [PAD.02X.02]  52.1,32.4 270 bottom
TP44  M01PTH  [1X01]  44.48,19.19 0 top
TP45  TEST-POINT3X5  [PAD.03X.05]  69.89,24.27 0 bottom
TP46  TEST-POINT3X5  [PAD.03X.05]  47.02,19.19 270 bottom
TP47  TEST-POINT2  [PAD.02X.02]  62.27,32.4 270 bottom
TP48  TPTP20R  [TP20R]  67.34,19.19 0 bottom
TP49  TEST-POINT2  [PAD.02X.02]  72.42,26.81 270 bottom
TP50  TPTP20R  [TP20R]  54.65,21.73 0 bottom
TP51  TPTP20R  [TP20R]  64.81,19.19 0 bottom
TP52  TPTP20R  [TP20R]  69.89,27.32 0 bottom
TP53  TEST-POINT2  [PAD.02X.02]  17.23,49.9 270 bottom
TP54  TEST-POINT2  [PAD.02X.02]  14.69,49.9 270 bottom
TP55  TEST-POINT2  [PAD.02X.02]  12.14,49.9 270 bottom
TP56  TEST-POINT2  [PAD.02X.02]  9.61,49.9 270 bottom
TP57  M01PTH  [1X01]  1.99,36.69 0 top
TP58  TEST-POINT3X5  [PAD.03X.05]  27.39,41.77 0 bottom
TP59  TEST-POINT3X5  [PAD.03X.05]  4.53,36.69 270 bottom
TP60  TEST-POINT2  [PAD.02X.02]  19.77,49.9 270 bottom
TP61  TPTP20R  [TP20R]  24.84,36.69 0 bottom
TP62  TEST-POINT2  [PAD.02X.02]  29.93,44.31 270 bottom
TP63  TPTP20R  [TP20R]  12.14,39.23 0 bottom
TP64  TPTP20R  [TP20R]  22.3,36.69 0 bottom
TP65  TPTP20R  [TP20R]  27.39,44.82 0 bottom
TP66  TEST-POINT2  [PAD.02X.02]  59.73,49.9 270 bottom
TP67  TEST-POINT2  [PAD.02X.02]  57.19,49.9 270 bottom
TP68  TEST-POINT2  [PAD.02X.02]  54.65,49.9 270 bottom
TP69  TEST-POINT2  [PAD.02X.02]  52.1,49.9 270 bottom
TP70  M01PTH  [1X01]  44.48,36.69 0 top
TP71  TEST-POINT3X5  [PAD.03X.05]  69.89,41.77 0 bottom
TP72  TEST-POINT3X5  [PAD.03X.05]  47.02,36.69 270 bottom
TP73  TEST-POINT2  [PAD.02X.02]  62.27,49.9 270 bottom
TP74  TPTP20R  [TP20R]  67.34,36.69 0 bottom
TP75  TEST-POINT2  [PAD.02X.02]  72.42,44.31 270 bottom
TP76  TPTP20R  [TP20R]  54.65,39.23 0 bottom
TP77  TPTP20R  [TP20R]  64.81,36.69 0 bottom
TP78  TPTP20R  [TP20R]  69.89,44.82 0 bottom
TP79  TEST-POINT3X5  [PAD.03X.05]  19.85,59.6 0 bottom
TP80  TEST-POINT3X5  [PAD.03X.05]  17.31,59.6 180 bottom
TP81  TPTP20R  [TP20R]  9.69,59.6 0 bottom
TP82  TPTP20R  [TP20R]  12.23,59.6 0 bottom
TP83  TPTP20R  [TP20R]  22.39,59.6 0 bottom
TP84  TPTP20R  [TP20R]  27.47,69.76 0 top
TP85  TPTP20R  [TP20R]  4.61,59.6 0 bottom
TP86  TPTP20R  [TP20R]  7.15,59.6 0 bottom
TP87  TPTP20R  [TP20R]  9.69,62.14 0 bottom
TP88  TPTP20R  [TP20R]  9.69,64.68 0 bottom
TP89  TPTP20R  [TP20R]  14.77,59.6 0 bottom
TP90  TPTP20R  [TP20R]  12.23,67.22 0 bottom
TP91  TPTP20R  [TP20R]  12.23,64.68 0 bottom
TP92  TPTP20R  [TP20R]  14.77,67.22 0 bottom
TP93  TPTP20R  [TP20R]  17.31,67.22 0 bottom
TP94  TPTP20R  [TP20R]  21.37,62.14 0 bottom
TP95  TEST-POINT3X5  [PAD.03X.05]  46.85,59.6 0 bottom
TP96  TEST-POINT3X5  [PAD.03X.05]  44.31,59.6 180 bottom
TP97  TPTP20R  [TP20R]  36.69,59.6 0 bottom
TP98  TPTP20R  [TP20R]  39.23,59.6 0 bottom
TP99  TPTP20R  [TP20R]  49.39,59.6 0 bottom
TP100  TPTP20R  [TP20R]  54.47,69.76 0 top
TP101  TPTP20R  [TP20R]  31.61,59.6 0 bottom
TP102  TPTP20R  [TP20R]  34.15,59.6 0 bottom
TP103  TPTP20R  [TP20R]  36.69,62.14 0 bottom
TP104  TPTP20R  [TP20R]  36.69,64.68 0 bottom
TP105  TPTP20R  [TP20R]  41.77,59.6 0 bottom
TP106  TPTP20R  [TP20R]  39.23,67.22 0 bottom
TP107  TPTP20R  [TP20R]  39.23,64.68 0 bottom
TP108  TPTP20R  [TP20R]  41.77,67.22 0 bottom
TP109  TPTP20R  [TP20R]  44.31,67.22 0 bottom
TP110  TPTP20R  [TP20R]  48.37,62.14 0 bottom
TP111  TEST-POINT2  [PAD.02X.02]  92.27,98.36 270 bottom
TP112  TEST-POINT2  [PAD.02X.02]  89.73,98.36 270 bottom
TP113  TEST-POINT2  [PAD.02X.02]  87.19,98.36 270 bottom
TP114  TEST-POINT2  [PAD.02X.02]  84.65,98.36 270 bottom
TP115  M01PTH  [1X01]  77.03,85.14 0 top
TP116  TEST-POINT3X5  [PAD.03X.05]  84.65,82.6 0 bottom
TP117  TEST-POINT3X5  [PAD.03X.05]  87.19,82.6 0 bottom
TP118  TEST-POINT3  [PAD.03X.03]  92.27,82.6 0 bottom
TP119  TEST-POINT2  [PAD.02X.02]  94.81,98.35 270 bottom
TP120  TEST-POINT3X5  [PAD.03X.05]  73.85,59.6 0 bottom
TP121  TEST-POINT3X5  [PAD.03X.05]  71.31,59.6 180 bottom
TP122  TPTP20R  [TP20R]  63.69,59.6 0 bottom
TP123  TPTP20R  [TP20R]  66.23,59.6 0 bottom
TP124  TPTP20R  [TP20R]  76.39,59.6 0 bottom
TP125  TPTP20R  [TP20R]  81.47,69.76 0 top
TP126  TPTP20R  [TP20R]  58.61,59.6 0 bottom
TP127  TEST-POINT2  [PAD.02X.02]  17.27,98.36 270 bottom
TP128  TEST-POINT2  [PAD.02X.02]  14.73,98.36 270 bottom
TP129  TEST-POINT2  [PAD.02X.02]  12.19,98.36 270 bottom
TP130  TEST-POINT2  [PAD.02X.02]  9.65,98.36 270 bottom
TP131  M01PTH  [1X01]  2.03,85.14 0 top
TP132  TEST-POINT3X5  [PAD.03X.05]  9.65,82.6 0 bottom
TP133  TEST-POINT3X5  [PAD.03X.05]  12.19,82.6 0 bottom
TP134  TEST-POINT3  [PAD.03X.03]  17.27,82.6 0 bottom
TP135  TEST-POINT2  [PAD.02X.02]  19.81,98.35 270 bottom
TP136  TEST-POINT2  [PAD.02X.02]  42.27,98.36 270 bottom
TP137  TEST-POINT2  [PAD.02X.02]  39.73,98.36 270 bottom
TP138  TEST-POINT2  [PAD.02X.02]  37.19,98.36 270 bottom
TP139  TEST-POINT2  [PAD.02X.02]  34.65,98.36 270 bottom
TP140  M01PTH  [1X01]  27.03,85.14 0 top
TP141  TEST-POINT3X5  [PAD.03X.05]  34.65,82.6 0 bottom
TP142  TEST-POINT3X5  [PAD.03X.05]  37.19,82.6 0 bottom
TP143  TEST-POINT3  [PAD.03X.03]  42.27,82.6 0 bottom
TP144  TEST-POINT2  [PAD.02X.02]  44.81,98.35 270 bottom
TP145  TEST-POINT2  [PAD.02X.02]  67.27,98.36 270 bottom
TP146  TEST-POINT2  [PAD.02X.02]  64.73,98.36 270 bottom
TP147  TEST-POINT2  [PAD.02X.02]  62.19,98.36 270 bottom
TP148  TEST-POINT2  [PAD.02X.02]  59.65,98.36 270 bottom
TP149  M01PTH  [1X01]  52.03,85.14 0 top
TP150  TEST-POINT3X5  [PAD.03X.05]  59.65,82.6 0 bottom
TP151  TEST-POINT3X5  [PAD.03X.05]  62.19,82.6 0 bottom
TP152  TEST-POINT3  [PAD.03X.03]  67.27,82.6 0 bottom
TP153  TEST-POINT2  [PAD.02X.02]  69.81,98.35 270 bottom
TP154  TPTP20R  [TP20R]  61.15,59.6 0 bottom
TP155  TPTP20R  [TP20R]  63.69,62.14 0 bottom
TP156  TPTP20R  [TP20R]  63.69,64.68 0 bottom
TP157  TPTP20R  [TP20R]  68.77,59.6 0 bottom
TP158  TPTP20R  [TP20R]  66.23,67.22 0 bottom
TP159  TPTP20R  [TP20R]  66.23,64.68 0 bottom
TP160  TPTP20R  [TP20R]  68.77,67.22 0 bottom
TP161  TPTP20R  [TP20R]  71.31,67.22 0 bottom
TP162  TPTP20R  [TP20R]  75.37,62.14 0 bottom
TP163  PTR1PAD1-13  [P1-13]  89.38,40.66 90 top
TP164  PTR1PAD1-13  [P1-13]  89.38,38.12 90 top
TP165  PTR1PAD1-13  [P1-13]  91.92,38.12 90 top
TP166  PTR1PAD1-13  [P1-13]  94.46,35.58 90 top
TP167  PTR1PAD1-13  [P1-13]  97,30.5 90 top
TP168  PTR1PAD1-13  [P1-13]  97,33.04 90 top
TP169  PTR1PAD1-13  [P1-13]  97,40.66 90 top
TP170  PTR1PAD1-13  [P1-13]  97,38.12 90 top
TP171  PTR1PAD1-13  [P1-13]  97,35.58 90 top
TP172  PTR1PAD1-13  [P1-13]  86.84,35.58 90 top
TP173  PTR1PAD1-13  [P1-13]  86.84,40.66 90 top
TP174  PTR1PAD1-13  [P1-13]  86.84,38.12 90 top
TP175  PTR1PAD1-13  [P1-13]  86.84,43.2 90 top
TP176  PTR1PAD1-13  [P1-13]  86.84,45.74 90 top
TP177  PTR1PAD1-13  [P1-13]  91.92,33.04 90 top
TP178  PTR1PAD1-13  [P1-13]  91.92,30.5 90 top
TP179  PTR1PAD1-13  [P1-13]  94.46,30.5 90 top
TP180  PTR1PAD1-13  [P1-13]  86.84,33.04 90 top
TP181  PTR1PAD1-13  [P1-13]  86.84,30.5 90 top
TP559  PTR1PAD1-13  [P1-13]  96.9,15.99 90 top
TP560  PTR1PAD1-13  [P1-13]  96.9,10.91 90 top
TP561  PTR1PAD1-13  [P1-13]  91.82,10.91 90 top
TP562  PTR1PAD1-13  [P1-13]  89.28,10.91 90 top
TP563  PTR1PAD1-13  [P1-13]  86.74,10.91 90 top
TP564  PTR1PAD1-13  [P1-13]  94.36,10.91 90 top
U1  MPU-6000QFN-24  [QFN-24-TESTING]  28.4,9.82 90 top
U2  MCP73831  [SOT23-5]  39.07,6.26 270 top
U3  MCP73831  [SOT23-5]  81.57,6.26 270 top
U4  MPU-6000QFN-24  [QFN-24-TESTING]  70.9,9.82 90 top
U5  MCP73831  [SOT23-5]  39.07,23.76 270 top
U6  MPU-6000QFN-24  [QFN-24-TESTING]  28.4,27.32 90 top
U7  MCP73831  [SOT23-5]  81.57,23.76 270 top
U8  MPU-6000QFN-24  [QFN-24-TESTING]  70.9,27.32 90 top
U9  MCP73831  [SOT23-5]  39.07,41.26 270 top
U10  MPU-6000QFN-24  [QFN-24-TESTING]  28.4,44.82 90 top
U11  MCP73831  [SOT23-5]  81.57,41.26 270 top
U12  MPU-6000QFN-24  [QFN-24-TESTING]  70.9,44.82 90 top
U13  MCP73831  [SOT23-5]  25.56,60.23 180 top
U14  MPU-6000QFN-24  [QFN-24-TESTING]  21.5,65.31 90 top
U15  [MLF32-PAD]  12.48,65.95 180 top
U16  MCP73831  [SOT23-5]  52.56,60.23 180 top
U17  MPU-6000QFN-24  [QFN-24-TESTING]  48.5,65.31 90 top
U18  [MLF32-PAD]  39.48,65.95 180 top
U19  MCP73831  [SOT23-5]  91.51,80.32 180 top
U20  MCP73831  [SOT23-5]  79.56,60.23 180 top
U21  MPU-6000QFN-24  [QFN-24-TESTING]  75.5,65.31 90 top
U22  MCP73831  [SOT23-5]  16.51,80.32 180 top
U23  MCP73831  [SOT23-5]  41.51,80.32 180 top
U24  MCP73831  [SOT23-5]  66.51,80.32 180 top
U25  [MLF32-PAD]  66.48,65.95 180 top
U$1  AVR_SPI_PROG  [AVR_ICSP]  91.92,49.55 270 bottom
U$6  AVR_SPI_PROG  [AVR_ICSP]  91.82,19.8 270 bottom